# EAGLE board 13594-ESP8266-Thing-Dev-4H-panel.10 (EAGLE 7.5.0), part 1 of 7
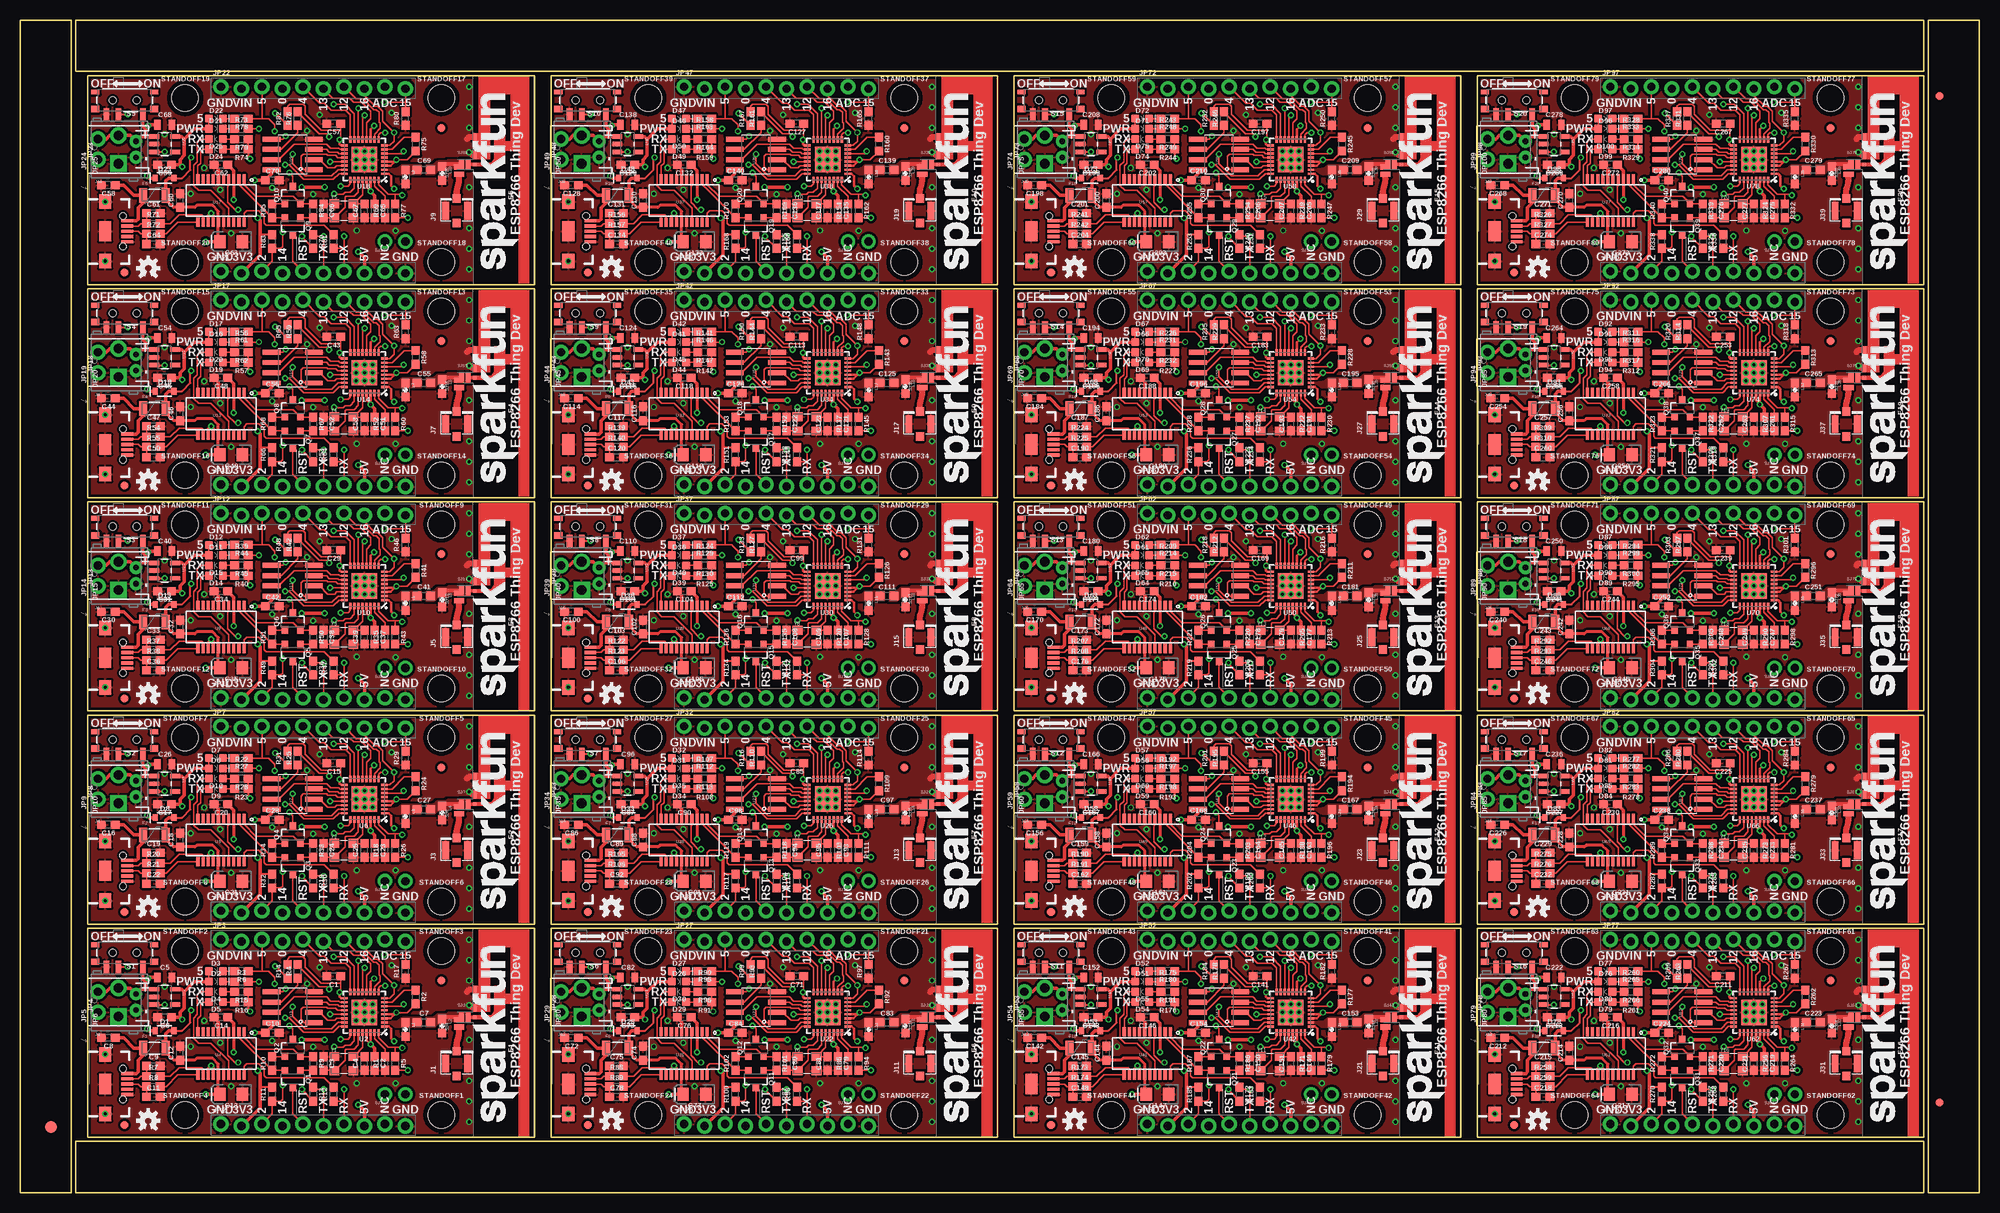
[diagram p0: board, top side]
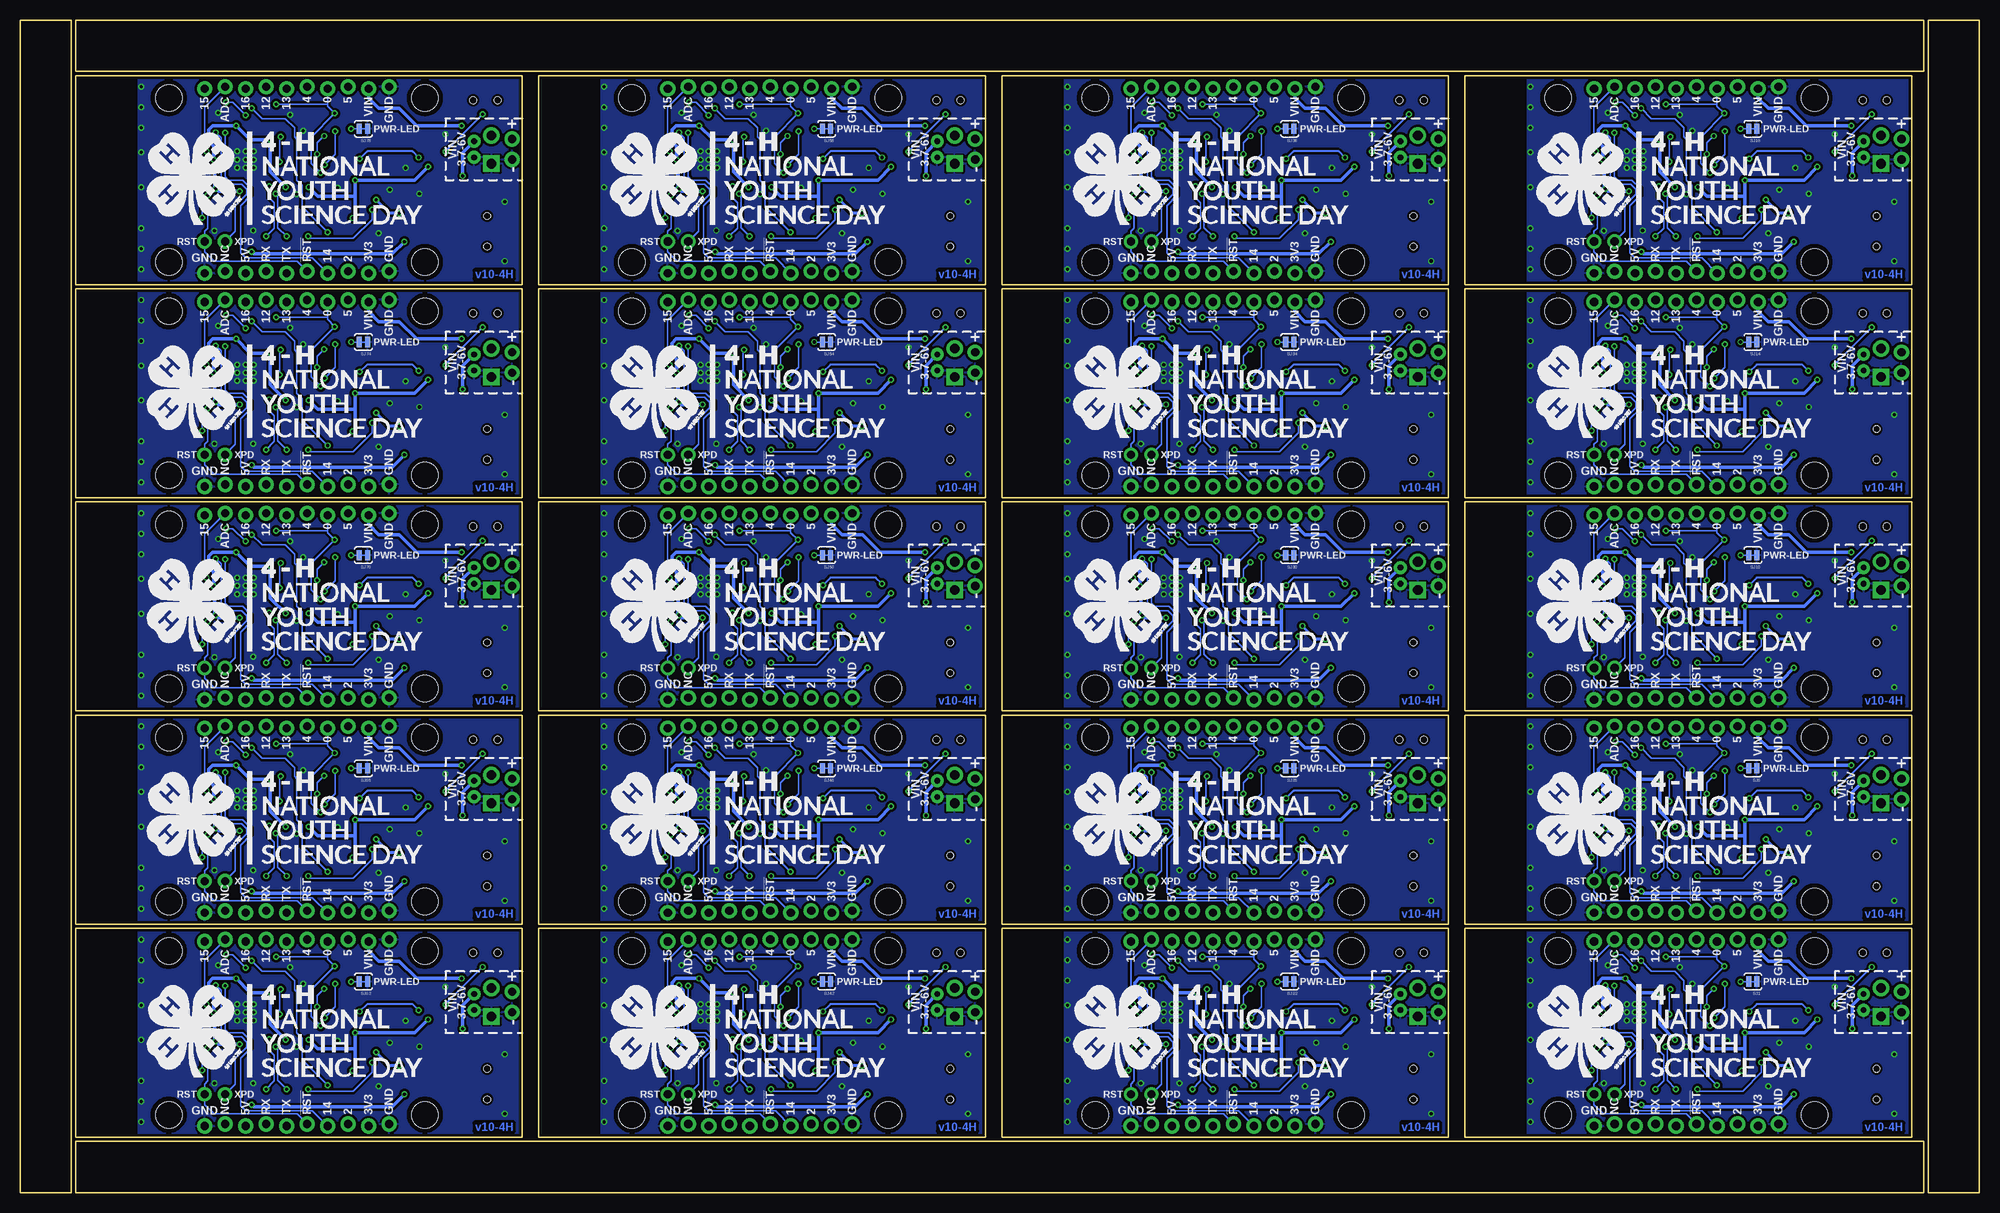
[diagram p1: board, bottom side, seen from below]

Size 242.82 x 145.29 mm. Coordinates in mm from the lower left corner, seen from the top.
Outline: 6.35,77.22 6.35,0 0,0 0,27.69
Outline: 0,25.15 0,145.29 6.35,145.29 6.35,74.68
Outline: 79.25,0 6.86,0 6.86,6.35 29.72,6.35
Outline: 27.18,6.35 235.97,6.35 235.97,0 76.71,0
Outline: 163.58,145.29 235.97,145.29 235.97,138.94 213.11,138.94
Outline: 215.65,138.94 6.86,138.94 6.86,145.29 166.12,145.29
Outline: 236.47,72.9 236.47,145.29 242.82,145.29 242.82,122.43
Outline: 242.82,124.97 242.82,0 236.47,0 236.47,75.44
Outline: 8.38,6.86 8.38,32.77 63.75,32.77 63.75,6.86 8.38,6.86
Outline: 8.38,33.27 8.38,59.18 63.75,59.18 63.75,33.27 8.38,33.27
Outline: 8.38,59.69 8.38,85.6 63.75,85.6 63.75,59.69 8.38,59.69
Outline: 8.38,86.11 8.38,112.01 63.75,112.01 63.75,86.11 8.38,86.11
Outline: 8.38,112.52 8.38,138.43 63.75,138.43 63.75,112.52 8.38,112.52
Outline: 65.79,6.86 65.79,32.77 121.16,32.77 121.16,6.86 65.79,6.86
Outline: 65.79,33.27 65.79,59.18 121.16,59.18 121.16,33.27 65.79,33.27
Outline: 65.79,59.69 65.79,85.6 121.16,85.6 121.16,59.69 65.79,59.69
Outline: 65.79,86.11 65.79,112.01 121.16,112.01 121.16,86.11 65.79,86.11
Outline: 65.79,112.52 65.79,138.43 121.16,138.43 121.16,112.52 65.79,112.52
Outline: 123.19,6.86 123.19,32.77 178.56,32.77 178.56,6.86 123.19,6.86
Outline: 123.19,33.27 123.19,59.18 178.56,59.18 178.56,33.27 123.19,33.27
Outline: 123.19,59.69 123.19,85.6 178.56,85.6 178.56,59.69 123.19,59.69
Outline: 123.19,86.11 123.19,112.01 178.56,112.01 178.56,86.11 123.19,86.11
Outline: 123.19,112.52 123.19,138.43 178.56,138.43 178.56,112.52 123.19,112.52
Outline: 180.59,6.86 180.59,32.77 235.97,32.77 235.97,6.86 180.59,6.86
Outline: 180.59,33.27 180.59,59.18 235.97,59.18 235.97,33.27 180.59,33.27
Outline: 180.59,59.69 180.59,85.6 235.97,85.6 235.97,59.69 180.59,59.69
Outline: 180.59,86.11 180.59,112.01 235.97,112.01 235.97,86.11 180.59,86.11
Outline: 180.59,112.52 180.59,138.43 235.97,138.43 235.97,112.52 180.59,112.52
Copper layers (1*16): Top 0.035mm / dielectric 1.5mm / Bottom 0.035mm
Design rules "SparkFun-2-layer-TIGHT": minimum track width 7mil, minimum drill 15mil, track to track 7mil, track to pad 7mil, pad to pad 7mil, via to via 7mil, smd to smd 7mil, copper to edge 7mil, drill to drill 7mil, minimum pad ring 7mil, minimum via ring 7mil, stop-mask expansion 4mil, vias tented up to drill 25mil, thermal gap 10mil

## Footprints (pad centres in the part's own frame; a part is rotated, then mirrored left to right if it is on the bottom)
0603 = smd 1.1 x 1: 1 -0.85,0; 2 0.85,0
0805 = smd 0.8 x 1.2: 1 -0.9,0; 2 0.9,0
EIA3216 = smd 1.4 x 1.6: + 1.4,0; - -1.4,0
SOD-323 = smd 0.63 x 0.83: A 1.15,0; C -1.15,0
LED-0603 = smd 1 x 1: A -0.877,0; C 0.877,0
TRACE_ANTENNA_2.4GHZ_25.7MM = smd 0.46 x 0.46: ANT 0,0.23 | smd 1 x 0.46: GND -1.18,0.23; GND2 -3.38,0.23
FIDUCIAL-1.5X3 = smd 1.5 x 1.5: 1 0,0
FIDUCIAL-1X2 = smd 1 x 1: 1 0,0
PTC-1206 = smd 1 x 1.8: 1 -1.4,0; 2 1.4,0
U.FL = smd 2.2 x 0.85: P$1 0,1.375; P$2 0,-1.375 | smd 1.05 x 1: P$3 1.525,0; P$4 -1.525,0
USB-B-MICRO-SMD_V03 = smd 1.45 x 0.4: D+ 2.725,0; D- 2.725,0.65; GND 2.725,-1.3; ID 2.725,-0.65; VBUS 2.725,1.3 | smd 1.5 x 1.8: SHIELD1 0,3.685; SHIELD2 0,-3.685 | smd 1.5 x 2.5: SHIELD3 0,0 | hole 0.85: 2.2,1.9; 2.2,-1.9
1X10_LOCK_NS = drill 1.016 pad 1.88: 1 0,0.127; 2 2.54,-0.127; 3 5.08,0.127; 4 7.62,-0.127; 5 10.16,0.127; 6 12.7,-0.127; 7 15.24,0.127; 8 17.78,-0.127; 9 20.32,0.127; 10 22.86,-0.127
JST-2-PTH = drill 0.7 pad 1.6: 1 -1,0; 2 1,0
1X02_NO_SILK = drill 1.016 pad 1.88: 1 0,0; 2 2.54,0
SCREWTERMINAL-3.5MM-2-NS = drill 1.2 pad 2.032 square: 1 0,0 | drill 1.2 pad 2.032: 2 3.5,0
SOT23-3 = smd 0.8 x 0.9: 1 -0.95,-1; 2 0.95,-1; 3 0,1.1
SWITCH_SPST_SMD_A = smd 0.7 x 1.5: 1 -2.25,-1.75; 2 -0.75,-1.75; 3 2.25,-1.75 | smd 1 x 0.6: GND1 -3.65,1; GND3 3.65,1 | smd 1 x 0.8: GND2 -3.65,-1.1; GND4 3.65,-1.1 | hole 0.9: -1.5,0; 1.5,0
PAD-JUMPER-2-NC_BY_TRACE_YES_SILK = smd 0.635 x 1.27: 1 -0.508,0; 2 0.508,0
PTH-JUMPER-2-NO_NO_SILK = drill 1.016 pad 1.778: 1 -1.27,0; 2 1.27,0
PAD-JUMPER-2-NC_BY_PASTE_NO_SILK = smd 0.635 x 1.27: 1 -0.401,0; 2 0.413,0
PAD-JUMPER-2-NO_NO_SILK = smd 0.635 x 1.27: 1 -0.45,0; 2 0.45,0
STAND-OFF = hole 3.302: 0,0
SOT23-5 = smd 0.55 x 1.2: 1 -0.95,-1.3; 2 0,-1.3; 3 0.95,-1.3; 4 0.95,1.3; 5 -0.95,1.3
QFN32-5X5MM = smd 0.8 x 0.285: 1 -2.5,1.75; 2 -2.5,1.25; 3 -2.5,0.75; 4 -2.5,0.25; 5 -2.5,-0.25; 6 -2.5,-0.75; 7 -2.5,-1.25; 8 -2.5,-1.75; 17 2.5,-1.75; 18 2.5,-1.25; 19 2.5,-0.75; 20 2.5,-0.25; 21 2.5,0.25; 22 2.5,0.75; 23 2.5,1.25; 24 2.5,1.75 | smd 0.285 x 0.8: 9 -1.75,-2.5; 10 -1.25,-2.5; 11 -0.75,-2.5; 12 -0.25,-2.5; 13 0.25,-2.5; 14 0.75,-2.5; 15 1.25,-2.5; 16 1.75,-2.5; 25 1.75,2.5; 26 1.25,2.5; 27 0.75,2.5; 28 0.25,2.5; 29 -0.25,2.5; 30 -0.75,2.5; 31 -1.25,2.5; 32 -1.75,2.5 | smd 3.15 x 3.15: EP 0,0
SO08 = smd 0.61 x 2.21: 1 -1.905,-2.616; 2 -0.635,-2.616; 3 0.635,-2.616; 4 1.905,-2.616; 5 1.905,2.616; 6 0.635,2.616; 7 -0.635,2.616; 8 -1.905,2.616
SSOP20_L = smd 0.381 x 1.143: 1 -2.857,-2.68; 2 -2.223,-2.68; 3 -1.587,-2.68; 4 -0.953,-2.68; 5 -0.318,-2.68; 6 0.318,-2.68; 7 0.953,-2.68; 8 1.587,-2.68; 9 2.223,-2.68; 10 2.857,-2.68; 11 2.857,2.68; 12 2.223,2.68; 13 1.587,2.68; 14 0.953,2.68; 15 0.318,2.68; 16 -0.318,2.68; 17 -0.953,2.68; 18 -1.587,2.68; 19 -2.223,2.68; 20 -2.857,2.68
CRYSTAL-SMD-3.2X2.5 = smd 1.2 x 1.1: 1 -1.175,-0.875; 2 1.175,-0.875; 3 1.175,0.875; 4 -1.175,0.875

## Placement (x,y rotation side)
C1  10uF  [0603]  38.86,26.8 180 top
C2  0.1uF  [0603]  43.94,16 270 top
C3  10pF  [0603]  37.59,16 270 top
C4  10pF  [0603]  42.67,16 90 top
C5  1.0uF  [0805]  17.91,26.67 0 top
C6  2.2uF  [0603]  17.91,21.72 180 top
C7  5.6PF  [0603]  50.04,21.11 0 top
C8  0.1uF  [0603]  10.92,19.18 180 top
C9  47pF  [0603]  16.51,15.7 0 top
C10  0.1uF  [0603]  31.24,19.81 0 top
C11  47pF  [0603]  16.51,11.89 0 top
C12  0.1uF  [0603]  19.81,17.27 90 top
C13  10uF  [EIA3216]  26.16,12.19 180 top
C14  0.1uF  [0603]  24.89,21.72 180 top
C15  10uF  [0603]  38.86,53.21 180 top
C16  0.1uF  [0603]  10.92,45.59 180 top
C17  2.2uF  [0603]  17.91,48.13 180 top
C18  0.1uF  [0603]  19.81,43.69 90 top
C19  47pF  [0603]  16.51,42.11 0 top
C20  0.1uF  [0603]  24.89,48.13 180 top
C21  10uF  [EIA3216]  26.16,38.61 180 top
C22  47pF  [0603]  16.51,38.3 0 top
C23  0.1uF  [0603]  43.94,42.42 270 top
C24  10pF  [0603]  37.59,42.42 270 top
C25  10pF  [0603]  42.67,42.42 90 top
C26  1.0uF  [0805]  17.91,53.09 0 top
C27  5.6PF  [0603]  50.04,47.52 0 top
C28  0.1uF  [0603]  31.24,46.23 0 top
C29  10uF  [0603]  38.86,79.63 180 top
C30  0.1uF  [0603]  10.92,72.01 180 top
C31  2.2uF  [0603]  17.91,74.55 180 top
C32  0.1uF  [0603]  19.81,70.1 90 top
C33  47pF  [0603]  16.51,68.53 0 top
C34  0.1uF  [0603]  24.89,74.55 180 top
C35  10uF  [EIA3216]  26.16,65.02 180 top
C36  47pF  [0603]  16.51,64.72 0 top
C37  0.1uF  [0603]  43.94,68.83 270 top
C38  10pF  [0603]  37.59,68.83 270 top
C39  10pF  [0603]  42.67,68.83 90 top
C40  1.0uF  [0805]  17.91,79.5 0 top
C41  5.6PF  [0603]  50.04,73.94 0 top
C42  0.1uF  [0603]  31.24,72.64 0 top
C43  10uF  [0603]  38.86,106.05 180 top
C44  0.1uF  [0603]  10.92,98.42 180 top
C45  2.2uF  [0603]  17.91,100.97 180 top
C46  0.1uF  [0603]  19.81,96.52 90 top
C47  47pF  [0603]  16.51,94.95 0 top
C48  0.1uF  [0603]  24.89,100.97 180 top
C49  10uF  [EIA3216]  26.16,91.44 180 top
C50  47pF  [0603]  16.51,91.14 0 top
C51  0.1uF  [0603]  43.94,95.25 270 top
C52  10pF  [0603]  37.59,95.25 270 top
C53  10pF  [0603]  42.67,95.25 90 top
C54  1.0uF  [0805]  17.91,105.92 0 top
C55  5.6PF  [0603]  50.04,100.35 0 top
C56  0.1uF  [0603]  31.24,99.06 0 top
C57  10uF  [0603]  38.86,132.46 180 top
C58  0.1uF  [0603]  10.92,124.84 180 top
C59  2.2uF  [0603]  17.91,127.38 180 top
C60  0.1uF  [0603]  19.81,122.94 90 top
C61  47pF  [0603]  16.51,121.36 0 top
C62  0.1uF  [0603]  24.89,127.38 180 top
C63  10uF  [EIA3216]  26.16,117.86 180 top
C64  47pF  [0603]  16.51,117.55 0 top
C65  0.1uF  [0603]  43.94,121.67 270 top
C66  10pF  [0603]  37.59,121.67 270 top
C67  10pF  [0603]  42.67,121.67 90 top
C68  1.0uF  [0805]  17.91,132.33 0 top
C69  5.6PF  [0603]  50.04,126.77 0 top
C70  0.1uF  [0603]  31.24,125.48 0 top
C71  10uF  [0603]  96.27,26.8 180 top
C72  0.1uF  [0603]  68.33,19.18 180 top
C73  2.2uF  [0603]  75.31,21.72 180 top
C74  0.1uF  [0603]  77.22,17.27 90 top
C75  47pF  [0603]  73.91,15.7 0 top
C76  0.1uF  [0603]  82.3,21.72 180 top
C77  10uF  [EIA3216]  83.57,12.19 180 top
C78  47pF  [0603]  73.91,11.89 0 top
C79  0.1uF  [0603]  101.35,16 270 top
C80  10pF  [0603]  95,16 270 top
C81  10pF  [0603]  100.08,16 90 top
C82  1.0uF  [0805]  75.31,26.67 0 top
C83  5.6PF  [0603]  107.44,21.11 0 top
C84  0.1uF  [0603]  88.65,19.81 0 top
C85  10uF  [0603]  96.27,53.21 180 top
C86  0.1uF  [0603]  68.33,45.59 180 top
C87  2.2uF  [0603]  75.31,48.13 180 top
C88  0.1uF  [0603]  77.22,43.69 90 top
C89  47pF  [0603]  73.91,42.11 0 top
C90  0.1uF  [0603]  82.3,48.13 180 top
C91  10uF  [EIA3216]  83.57,38.61 180 top
C92  47pF  [0603]  73.91,38.3 0 top
C93  0.1uF  [0603]  101.35,42.42 270 top
C94  10pF  [0603]  95,42.42 270 top
C95  10pF  [0603]  100.08,42.42 90 top
C96  1.0uF  [0805]  75.31,53.09 0 top
C97  5.6PF  [0603]  107.44,47.52 0 top
C98  0.1uF  [0603]  88.65,46.23 0 top
C99  10uF  [0603]  96.27,79.63 180 top
C100  0.1uF  [0603]  68.33,72.01 180 top
C101  2.2uF  [0603]  75.31,74.55 180 top
C102  0.1uF  [0603]  77.22,70.1 90 top
C103  47pF  [0603]  73.91,68.53 0 top
C104  0.1uF  [0603]  82.3,74.55 180 top
C105  10uF  [EIA3216]  83.57,65.02 180 top
C106  47pF  [0603]  73.91,64.72 0 top
C107  0.1uF  [0603]  101.35,68.83 270 top
C108  10pF  [0603]  95,68.83 270 top
C109  10pF  [0603]  100.08,68.83 90 top
C110  1.0uF  [0805]  75.31,79.5 0 top
C111  5.6PF  [0603]  107.44,73.94 0 top
C112  0.1uF  [0603]  88.65,72.64 0 top
C113  10uF  [0603]  96.27,106.05 180 top
C114  0.1uF  [0603]  68.33,98.42 180 top
C115  2.2uF  [0603]  75.31,100.97 180 top
C116  0.1uF  [0603]  77.22,96.52 90 top
C117  47pF  [0603]  73.91,94.95 0 top
C118  0.1uF  [0603]  82.3,100.97 180 top
C119  10uF  [EIA3216]  83.57,91.44 180 top
C120  47pF  [0603]  73.91,91.14 0 top
C121  0.1uF  [0603]  101.35,95.25 270 top
C122  10pF  [0603]  95,95.25 270 top
C123  10pF  [0603]  100.08,95.25 90 top
C124  1.0uF  [0805]  75.31,105.92 0 top
C125  5.6PF  [0603]  107.44,100.35 0 top
C126  0.1uF  [0603]  88.65,99.06 0 top
C127  10uF  [0603]  96.27,132.46 180 top
C128  0.1uF  [0603]  68.33,124.84 180 top
C129  2.2uF  [0603]  75.31,127.38 180 top
C130  0.1uF  [0603]  77.22,122.94 90 top
C131  47pF  [0603]  73.91,121.36 0 top
C132  0.1uF  [0603]  82.3,127.38 180 top
C133  10uF  [EIA3216]  83.57,117.86 180 top
C134  47pF  [0603]  73.91,117.55 0 top
C135  0.1uF  [0603]  101.35,121.67 270 top
C136  10pF  [0603]  95,121.67 270 top
C137  10pF  [0603]  100.08,121.67 90 top
C138  1.0uF  [0805]  75.31,132.33 0 top
C139  5.6PF  [0603]  107.44,126.77 0 top
C140  0.1uF  [0603]  88.65,125.48 0 top
C141  10uF  [0603]  153.67,26.8 180 top
C142  0.1uF  [0603]  125.73,19.18 180 top
C143  2.2uF  [0603]  132.72,21.72 180 top
C144  0.1uF  [0603]  134.62,17.27 90 top
C145  47pF  [0603]  131.32,15.7 0 top
C146  0.1uF  [0603]  139.7,21.72 180 top
C147  10uF  [EIA3216]  140.97,12.19 180 top
C148  47pF  [0603]  131.32,11.89 0 top
C149  0.1uF  [0603]  158.75,16 270 top
C150  10pF  [0603]  152.4,16 270 top
C151  10pF  [0603]  157.48,16 90 top
C152  1.0uF  [0805]  132.72,26.67 0 top
C153  5.6PF  [0603]  164.85,21.11 0 top
C154  0.1uF  [0603]  146.05,19.81 0 top
C155  10uF  [0603]  153.67,53.21 180 top
C156  0.1uF  [0603]  125.73,45.59 180 top
C157  2.2uF  [0603]  132.72,48.13 180 top
C158  0.1uF  [0603]  134.62,43.69 90 top
C159  47pF  [0603]  131.32,42.11 0 top
C160  0.1uF  [0603]  139.7,48.13 180 top
C161  10uF  [EIA3216]  140.97,38.61 180 top
C162  47pF  [0603]  131.32,38.3 0 top
C163  0.1uF  [0603]  158.75,42.42 270 top
C164  10pF  [0603]  152.4,42.42 270 top
C165  10pF  [0603]  157.48,42.42 90 top
C166  1.0uF  [0805]  132.72,53.09 0 top
C167  5.6PF  [0603]  164.85,47.52 0 top
C168  0.1uF  [0603]  146.05,46.23 0 top
C169  10uF  [0603]  153.67,79.63 180 top
C170  0.1uF  [0603]  125.73,72.01 180 top
C171  2.2uF  [0603]  132.72,74.55 180 top
C172  0.1uF  [0603]  134.62,70.1 90 top
C173  47pF  [0603]  131.32,68.53 0 top
C174  0.1uF  [0603]  139.7,74.55 180 top
C175  10uF  [EIA3216]  140.97,65.02 180 top
C176  47pF  [0603]  131.32,64.72 0 top
C177  0.1uF  [0603]  158.75,68.83 270 top
C178  10pF  [0603]  152.4,68.83 270 top
C179  10pF  [0603]  157.48,68.83 90 top
C180  1.0uF  [0805]  132.72,79.5 0 top
C181  5.6PF  [0603]  164.85,73.94 0 top
C182  0.1uF  [0603]  146.05,72.64 0 top
C183  10uF  [0603]  153.67,106.05 180 top
C184  0.1uF  [0603]  125.73,98.42 180 top
C185  2.2uF  [0603]  132.72,100.97 180 top
C186  0.1uF  [0603]  134.62,96.52 90 top
C187  47pF  [0603]  131.32,94.95 0 top
C188  0.1uF  [0603]  139.7,100.97 180 top
C189  10uF  [EIA3216]  140.97,91.44 180 top
C190  47pF  [0603]  131.32,91.14 0 top
C191  0.1uF  [0603]  158.75,95.25 270 top
C192  10pF  [0603]  152.4,95.25 270 top
C193  10pF  [0603]  157.48,95.25 90 top
C194  1.0uF  [0805]  132.72,105.92 0 top
C195  5.6PF  [0603]  164.85,100.35 0 top
C196  0.1uF  [0603]  146.05,99.06 0 top
C197  10uF  [0603]  153.67,132.46 180 top
C198  0.1uF  [0603]  125.73,124.84 180 top
C199  2.2uF  [0603]  132.72,127.38 180 top
C200  0.1uF  [0603]  134.62,122.94 90 top
C201  47pF  [0603]  131.32,121.36 0 top
C202  0.1uF  [0603]  139.7,127.38 180 top
C203  10uF  [EIA3216]  140.97,117.86 180 top
C204  47pF  [0603]  131.32,117.55 0 top
C205  0.1uF  [0603]  158.75,121.67 270 top
C206  10pF  [0603]  152.4,121.67 270 top
C207  10pF  [0603]  157.48,121.67 90 top
C208  1.0uF  [0805]  132.72,132.33 0 top
C209  5.6PF  [0603]  164.85,126.77 0 top
C210  0.1uF  [0603]  146.05,125.48 0 top
C211  10uF  [0603]  211.07,26.8 180 top
C212  0.1uF  [0603]  183.13,19.18 180 top
C213  2.2uF  [0603]  190.12,21.72 180 top
C214  0.1uF  [0603]  192.02,17.27 90 top
C215  47pF  [0603]  188.72,15.7 0 top
C216  0.1uF  [0603]  197.1,21.72 180 top
C217  10uF  [EIA3216]  198.37,12.19 180 top
C218  47pF  [0603]  188.72,11.89 0 top
C219  0.1uF  [0603]  216.15,16 270 top
C220  10pF  [0603]  209.8,16 270 top
C221  10pF  [0603]  214.88,16 90 top
C222  1.0uF  [0805]  190.12,26.67 0 top
C223  5.6PF  [0603]  222.25,21.11 0 top
C224  0.1uF  [0603]  203.45,19.81 0 top
C225  10uF  [0603]  211.07,53.21 180 top
C226  0.1uF  [0603]  183.13,45.59 180 top
C227  2.2uF  [0603]  190.12,48.13 180 top
C228  0.1uF  [0603]  192.02,43.69 90 top
C229  47pF  [0603]  188.72,42.11 0 top
C230  0.1uF  [0603]  197.1,48.13 180 top
C231  10uF  [EIA3216]  198.37,38.61 180 top
C232  47pF  [0603]  188.72,38.3 0 top
C233  0.1uF  [0603]  216.15,42.42 270 top
C234  10pF  [0603]  209.8,42.42 270 top
C235  10pF  [0603]  214.88,42.42 90 top
C236  1.0uF  [0805]  190.12,53.09 0 top
C237  5.6PF  [0603]  222.25,47.52 0 top
C238  0.1uF  [0603]  203.45,46.23 0 top
C239  10uF  [0603]  211.07,79.63 180 top
C240  0.1uF  [0603]  183.13,72.01 180 top
C241  2.2uF  [0603]  190.12,74.55 180 top
C242  0.1uF  [0603]  192.02,70.1 90 top
C243  47pF  [0603]  188.72,68.53 0 top
C244  0.1uF  [0603]  197.1,74.55 180 top
C245  10uF  [EIA3216]  198.37,65.02 180 top
C246  47pF  [0603]  188.72,64.72 0 top
C247  0.1uF  [0603]  216.15,68.83 270 top
C248  10pF  [0603]  209.8,68.83 270 top
C249  10pF  [0603]  214.88,68.83 90 top
C250  1.0uF  [0805]  190.12,79.5 0 top
C251  5.6PF  [0603]  222.25,73.94 0 top
C252  0.1uF  [0603]  203.45,72.64 0 top
C253  10uF  [0603]  211.07,106.05 180 top
C254  0.1uF  [0603]  183.13,98.42 180 top
C255  2.2uF  [0603]  190.12,100.97 180 top
C256  0.1uF  [0603]  192.02,96.52 90 top
C257  47pF  [0603]  188.72,94.95 0 top
C258  0.1uF  [0603]  197.1,100.97 180 top
C259  10uF  [EIA3216]  198.37,91.44 180 top
C260  47pF  [0603]  188.72,91.14 0 top
C261  0.1uF  [0603]  216.15,95.25 270 top
C262  10pF  [0603]  209.8,95.25 270 top
C263  10pF  [0603]  214.88,95.25 90 top
C264  1.0uF  [0805]  190.12,105.92 0 top
C265  5.6PF  [0603]  222.25,100.35 0 top
C266  0.1uF  [0603]  203.45,99.06 0 top
C267  10uF  [0603]  211.07,132.46 180 top
C268  0.1uF  [0603]  183.13,124.84 180 top
C269  2.2uF  [0603]  190.12,127.38 180 top
C270  0.1uF  [0603]  192.02,122.94 90 top
C271  47pF  [0603]  188.72,121.36 0 top
C272  0.1uF  [0603]  197.1,127.38 180 top
C273  10uF  [EIA3216]  198.37,117.86 180 top
C274  47pF  [0603]  188.72,117.55 0 top
C275  0.1uF  [0603]  216.15,121.67 270 top
C276  10pF  [0603]  209.8,121.67 270 top
C277  10pF  [0603]  214.88,121.67 90 top
C278  1.0uF  [0805]  190.12,132.33 0 top
C279  5.6PF  [0603]  222.25,126.77 0 top
C280  0.1uF  [0603]  203.45,125.48 0 top
D1  1A/23V/620mV  [SOD-323]  17.91,20.07 0 top
D2  RED  [LED-0603]  24.26,26.16 0 top
D3  BLUE  [LED-0603]  24.26,27.43 0 top
D4  Yellow  [LED-0603]  24.26,24.89 180 top
D5  GREEN  [LED-0603]  24.26,23.62 180 top
D6  RED  [LED-0603]  24.26,52.58 0 top
D7  BLUE  [LED-0603]  24.26,53.85 0 top
D8  1A/23V/620mV  [SOD-323]  17.91,46.48 0 top
D9  GREEN  [LED-0603]  24.26,50.04 180 top
D10  Yellow  [LED-0603]  24.26,51.31 180 top
D11  RED  [LED-0603]  24.26,78.99 0 top
D12  BLUE  [LED-0603]  24.26,80.26 0 top
D13  1A/23V/620mV  [SOD-323]  17.91,72.9 0 top
D14  GREEN  [LED-0603]  24.26,76.45 180 top
D15  Yellow  [LED-0603]  24.26,77.72 180 top
D16  RED  [LED-0603]  24.26,105.41 0 top
D17  BLUE  [LED-0603]  24.26,106.68 0 top
D18  1A/23V/620mV  [SOD-323]  17.91,99.31 0 top
D19  GREEN  [LED-0603]  24.26,102.87 180 top
D20  Yellow  [LED-0603]  24.26,104.14 180 top
D21  RED  [LED-0603]  24.26,131.83 0 top
D22  BLUE  [LED-0603]  24.26,133.1 0 top
D23  1A/23V/620mV  [SOD-323]  17.91,125.73 0 top
D24  GREEN  [LED-0603]  24.26,129.29 180 top
D25  Yellow  [LED-0603]  24.26,130.56 180 top
D26  RED  [LED-0603]  81.66,26.16 0 top
D27  BLUE  [LED-0603]  81.66,27.43 0 top
D28  1A/23V/620mV  [SOD-323]  75.31,20.07 0 top
D29  GREEN  [LED-0603]  81.66,23.62 180 top
D30  Yellow  [LED-0603]  81.66,24.89 180 top
D31  RED  [LED-0603]  81.66,52.58 0 top
D32  BLUE  [LED-0603]  81.66,53.85 0 top
D33  1A/23V/620mV  [SOD-323]  75.31,46.48 0 top
D34  GREEN  [LED-0603]  81.66,50.04 180 top
D35  Yellow  [LED-0603]  81.66,51.31 180 top
D36  RED  [LED-0603]  81.66,78.99 0 top
D37  BLUE  [LED-0603]  81.66,80.26 0 top
D38  1A/23V/620mV  [SOD-323]  75.31,72.9 0 top
D39  GREEN  [LED-0603]  81.66,76.45 180 top
D40  Yellow  [LED-0603]  81.66,77.72 180 top
D41  RED  [LED-0603]  81.66,105.41 0 top
D42  BLUE  [LED-0603]  81.66,106.68 0 top
D43  1A/23V/620mV  [SOD-323]  75.31,99.31 0 top
D44  GREEN  [LED-0603]  81.66,102.87 180 top
D45  Yellow  [LED-0603]  81.66,104.14 180 top
D46  RED  [LED-0603]  81.66,131.83 0 top
D47  BLUE  [LED-0603]  81.66,133.1 0 top
D48  1A/23V/620mV  [SOD-323]  75.31,125.73 0 top
D49  GREEN  [LED-0603]  81.66,129.29 180 top
D50  Yellow  [LED-0603]  81.66,130.56 180 top
D51  RED  [LED-0603]  139.06,26.16 0 top
D52  BLUE  [LED-0603]  139.06,27.43 0 top
D53  1A/23V/620mV  [SOD-323]  132.72,20.07 0 top
D54  GREEN  [LED-0603]  139.06,23.62 180 top
D55  Yellow  [LED-0603]  139.06,24.89 180 top
D56  RED  [LED-0603]  139.06,52.58 0 top
D57  BLUE  [LED-0603]  139.06,53.85 0 top
D58  1A/23V/620mV  [SOD-323]  132.72,46.48 0 top
D59  GREEN  [LED-0603]  139.06,50.04 180 top
D60  Yellow  [LED-0603]  139.06,51.31 180 top
D61  RED  [LED-0603]  139.06,78.99 0 top
D62  BLUE  [LED-0603]  139.06,80.26 0 top
D63  1A/23V/620mV  [SOD-323]  132.72,72.9 0 top
D64  GREEN  [LED-0603]  139.06,76.45 180 top
D65  Yellow  [LED-0603]  139.06,77.72 180 top
D66  RED  [LED-0603]  139.06,105.41 0 top
D67  BLUE  [LED-0603]  139.06,106.68 0 top
D68  1A/23V/620mV  [SOD-323]  132.72,99.31 0 top
D69  GREEN  [LED-0603]  139.06,102.87 180 top
D70  Yellow  [LED-0603]  139.06,104.14 180 top
D71  RED  [LED-0603]  139.06,131.83 0 top
D72  BLUE  [LED-0603]  139.06,133.1 0 top
D73  1A/23V/620mV  [SOD-323]  132.72,125.73 0 top
D74  GREEN  [LED-0603]  139.06,129.29 180 top
D75  Yellow  [LED-0603]  139.06,130.56 180 top
D76  RED  [LED-0603]  196.47,26.16 0 top
D77  BLUE  [LED-0603]  196.47,27.43 0 top
D78  1A/23V/620mV  [SOD-323]  190.12,20.07 0 top
D79  GREEN  [LED-0603]  196.47,23.62 180 top
D80  Yellow  [LED-0603]  196.47,24.89 180 top
D81  RED  [LED-0603]  196.47,52.58 0 top
D82  BLUE  [LED-0603]  196.47,53.85 0 top
D83  1A/23V/620mV  [SOD-323]  190.12,46.48 0 top
D84  GREEN  [LED-0603]  196.47,50.04 180 top
D85  Yellow  [LED-0603]  196.47,51.31 180 top
D86  RED  [LED-0603]  196.47,78.99 0 top
D87  BLUE  [LED-0603]  196.47,80.26 0 top
D88  1A/23V/620mV  [SOD-323]  190.12,72.9 0 top
D89  GREEN  [LED-0603]  196.47,76.45 180 top
D90  Yellow  [LED-0603]  196.47,77.72 180 top
D91  RED  [LED-0603]  196.47,105.41 0 top
D92  BLUE  [LED-0603]  196.47,106.68 0 top
D93  1A/23V/620mV  [SOD-323]  190.12,99.31 0 top
D94  GREEN  [LED-0603]  196.47,102.87 180 top
D95  Yellow  [LED-0603]  196.47,104.14 180 top
D96  RED  [LED-0603]  196.47,131.83 0 top
D97  BLUE  [LED-0603]  196.47,133.1 0 top
D98  1A/23V/620mV  [SOD-323]  190.12,125.73 0 top
D99  GREEN  [LED-0603]  196.47,129.29 180 top
D100  Yellow  [LED-0603]  196.47,130.56 180 top
E1  [TRACE_ANTENNA_2.4GHZ_25.7MM]  56.13,21.74 270 top
E2  [TRACE_ANTENNA_2.4GHZ_25.7MM]  56.13,48.16 270 top
E3  [TRACE_ANTENNA_2.4GHZ_25.7MM]  56.13,74.57 270 top
E4  [TRACE_ANTENNA_2.4GHZ_25.7MM]  56.13,100.99 270 top
E5  [TRACE_ANTENNA_2.4GHZ_25.7MM]  56.13,127.41 270 top
E6  [TRACE_ANTENNA_2.4GHZ_25.7MM]  113.54,21.74 270 top
E7  [TRACE_ANTENNA_2.4GHZ_25.7MM]  113.54,48.16 270 top
E8  [TRACE_ANTENNA_2.4GHZ_25.7MM]  113.54,74.57 270 top
E9  [TRACE_ANTENNA_2.4GHZ_25.7MM]  113.54,100.99 270 top
E10  [TRACE_ANTENNA_2.4GHZ_25.7MM]  113.54,127.41 270 top
E11  [TRACE_ANTENNA_2.4GHZ_25.7MM]  170.94,21.74 270 top
E12  [TRACE_ANTENNA_2.4GHZ_25.7MM]  170.94,48.16 270 top
E13  [TRACE_ANTENNA_2.4GHZ_25.7MM]  170.94,74.57 270 top
E14  [TRACE_ANTENNA_2.4GHZ_25.7MM]  170.94,100.99 270 top
E15  [TRACE_ANTENNA_2.4GHZ_25.7MM]  170.94,127.41 270 top
E16  [TRACE_ANTENNA_2.4GHZ_25.7MM]  228.35,21.74 270 top
E17  [TRACE_ANTENNA_2.4GHZ_25.7MM]  228.35,48.16 270 top
E18  [TRACE_ANTENNA_2.4GHZ_25.7MM]  228.35,74.57 270 top
E19  [TRACE_ANTENNA_2.4GHZ_25.7MM]  228.35,100.99 270 top
E20  [TRACE_ANTENNA_2.4GHZ_25.7MM]  228.35,127.41 270 top
E$1  [FIDUCIAL-1.5X3]  3.81,8.13 0 top
E$7  [FIDUCIAL-1X2]  237.87,135.89 180 top
E$8  [FIDUCIAL-1X2]  237.87,11.18 0 top
F1  500mA  [PTC-1206]  16.64,17.91 0 top
F2  500mA  [PTC-1206]  16.64,44.32 0 top
F3  500mA  [PTC-1206]  16.64,70.74 0 top
F4  500mA  [PTC-1206]  16.64,97.16 0 top
F5  500mA  [PTC-1206]  16.64,123.57 0 top
F6  500mA  [PTC-1206]  74.04,17.91 0 top
F7  500mA  [PTC-1206]  74.04,44.32 0 top
F8  500mA  [PTC-1206]  74.04,70.74 0 top
F9  500mA  [PTC-1206]  74.04,97.16 0 top
F10  500mA  [PTC-1206]  74.04,123.57 0 top
F11  500mA  [PTC-1206]  131.44,17.91 0 top
F12  500mA  [PTC-1206]  131.44,44.32 0 top
F13  500mA  [PTC-1206]  131.44,70.74 0 top
F14  500mA  [PTC-1206]  131.44,97.16 0 top
F15  500mA  [PTC-1206]  131.44,123.57 0 top
F16  500mA  [PTC-1206]  188.85,17.91 0 top
F17  500mA  [PTC-1206]  188.85,44.32 0 top
F18  500mA  [PTC-1206]  188.85,70.74 0 top
F19  500mA  [PTC-1206]  188.85,97.16 0 top
F20  500mA  [PTC-1206]  188.85,123.57 0 top
FID1  FIDUCIAL1X2  [FIDUCIAL-1X2]  52.2,26.29 0 top
FID2  FIDUCIAL1X2  [FIDUCIAL-1X2]  12.95,8.38 0 top
FID3  FIDUCIAL1X2  [FIDUCIAL-1X2]  12.95,34.8 0 top
FID4  FIDUCIAL1X2  [FIDUCIAL-1X2]  52.2,52.7 0 top
FID5  FIDUCIAL1X2  [FIDUCIAL-1X2]  12.95,61.21 0 top
FID6  FIDUCIAL1X2  [FIDUCIAL-1X2]  52.2,79.12 0 top
FID7  FIDUCIAL1X2  [FIDUCIAL-1X2]  12.95,87.63 0 top
FID8  FIDUCIAL1X2  [FIDUCIAL-1X2]  52.2,105.54 0 top
FID9  FIDUCIAL1X2  [FIDUCIAL-1X2]  12.95,114.05 0 top
FID10  FIDUCIAL1X2  [FIDUCIAL-1X2]  52.2,131.95 0 top
FID11  FIDUCIAL1X2  [FIDUCIAL-1X2]  70.36,8.38 0 top
FID12  FIDUCIAL1X2  [FIDUCIAL-1X2]  109.6,26.29 0 top
FID13  FIDUCIAL1X2  [FIDUCIAL-1X2]  70.36,34.8 0 top
FID14  FIDUCIAL1X2  [FIDUCIAL-1X2]  109.6,52.7 0 top
FID15  FIDUCIAL1X2  [FIDUCIAL-1X2]  70.36,61.21 0 top
FID16  FIDUCIAL1X2  [FIDUCIAL-1X2]  109.6,79.12 0 top
FID17  FIDUCIAL1X2  [FIDUCIAL-1X2]  70.36,87.63 0 top
FID18  FIDUCIAL1X2  [FIDUCIAL-1X2]  109.6,105.54 0 top
FID19  FIDUCIAL1X2  [FIDUCIAL-1X2]  70.36,114.05 0 top
FID20  FIDUCIAL1X2  [FIDUCIAL-1X2]  109.6,131.95 0 top
FID21  FIDUCIAL1X2  [FIDUCIAL-1X2]  127.76,8.38 0 top
FID22  FIDUCIAL1X2  [FIDUCIAL-1X2]  167,26.29 0 top
FID23  FIDUCIAL1X2  [FIDUCIAL-1X2]  127.76,34.8 0 top
FID24  FIDUCIAL1X2  [FIDUCIAL-1X2]  167,52.7 0 top
FID25  FIDUCIAL1X2  [FIDUCIAL-1X2]  127.76,61.21 0 top
FID26  FIDUCIAL1X2  [FIDUCIAL-1X2]  167,79.12 0 top
FID27  FIDUCIAL1X2  [FIDUCIAL-1X2]  127.76,87.63 0 top
FID28  FIDUCIAL1X2  [FIDUCIAL-1X2]  167,105.54 0 top
FID29  FIDUCIAL1X2  [FIDUCIAL-1X2]  127.76,114.05 0 top
FID30  FIDUCIAL1X2  [FIDUCIAL-1X2]  167,131.95 0 top
FID31  FIDUCIAL1X2  [FIDUCIAL-1X2]  185.17,8.38 0 top
FID32  FIDUCIAL1X2  [FIDUCIAL-1X2]  224.41,26.29 0 top
FID33  FIDUCIAL1X2  [FIDUCIAL-1X2]  185.17,34.8 0 top
FID34  FIDUCIAL1X2  [FIDUCIAL-1X2]  224.41,52.7 0 top
FID35  FIDUCIAL1X2  [FIDUCIAL-1X2]  185.17,61.21 0 top
FID36  FIDUCIAL1X2  [FIDUCIAL-1X2]  224.41,79.12 0 top
FID37  FIDUCIAL1X2  [FIDUCIAL-1X2]  185.17,87.63 0 top
FID38  FIDUCIAL1X2  [FIDUCIAL-1X2]  224.41,105.54 0 top
FID39  FIDUCIAL1X2  [FIDUCIAL-1X2]  185.17,114.05 0 top
FID40  FIDUCIAL1X2  [FIDUCIAL-1X2]  224.41,131.95 0 top
J1  U.FL  [U.FL]  54.1,16 90 top
J2  [USB-B-MICRO-SMD_V03]  10.54,13.46 0 top
J3  U.FL  [U.FL]  54.1,42.42 90 top
J4  [USB-B-MICRO-SMD_V03]  10.54,39.88 0 top
J5  U.FL  [U.FL]  54.1,68.83 90 top
J6  [USB-B-MICRO-SMD_V03]  10.54,66.29 0 top
J7  U.FL  [U.FL]  54.1,95.25 90 top
J8  [USB-B-MICRO-SMD_V03]  10.54,92.71 0 top
J9  U.FL  [U.FL]  54.1,121.67 90 top
J10  [USB-B-MICRO-SMD_V03]  10.54,119.13 0 top
J11  U.FL  [U.FL]  111.51,16 90 top
J12  [USB-B-MICRO-SMD_V03]  67.94,13.46 0 top
J13  U.FL  [U.FL]  111.51,42.42 90 top
J14  [USB-B-MICRO-SMD_V03]  67.94,39.88 0 top
J15  U.FL  [U.FL]  111.51,68.83 90 top
J16  [USB-B-MICRO-SMD_V03]  67.94,66.29 0 top
J17  U.FL  [U.FL]  111.51,95.25 90 top
J18  [USB-B-MICRO-SMD_V03]  67.94,92.71 0 top
J19  U.FL  [U.FL]  111.51,121.67 90 top
J20  [USB-B-MICRO-SMD_V03]  67.94,119.13 0 top
J21  U.FL  [U.FL]  168.91,16 90 top
J22  [USB-B-MICRO-SMD_V03]  125.35,13.46 0 top
J23  U.FL  [U.FL]  168.91,42.42 90 top
J24  [USB-B-MICRO-SMD_V03]  125.35,39.88 0 top
J25  U.FL  [U.FL]  168.91,68.83 90 top
J26  [USB-B-MICRO-SMD_V03]  125.35,66.29 0 top
J27  U.FL  [U.FL]  168.91,95.25 90 top
J28  [USB-B-MICRO-SMD_V03]  125.35,92.71 0 top
J29  U.FL  [U.FL]  168.91,121.67 90 top
J30  [USB-B-MICRO-SMD_V03]  125.35,119.13 0 top
J31  U.FL  [U.FL]  226.31,16 90 top
J32  [USB-B-MICRO-SMD_V03]  182.75,13.46 0 top
J33  U.FL  [U.FL]  226.31,42.42 90 top
J34  [USB-B-MICRO-SMD_V03]  182.75,39.88 0 top
J35  U.FL  [U.FL]  226.31,68.83 90 top
J36  [USB-B-MICRO-SMD_V03]  182.75,66.29 0 top
J37  U.FL  [U.FL]  226.31,95.25 90 top
J38  [USB-B-MICRO-SMD_V03]  182.75,92.71 0 top
J39  U.FL  [U.FL]  226.31,121.67 90 top
J40  [USB-B-MICRO-SMD_V03]  182.75,119.13 0 top
JP1  [1X10_LOCK_NS]  24.89,34.8 0 top
JP2  [1X10_LOCK_NS]  24.89,8.38 0 top
JP3  [1X10_LOCK_NS]  24.89,31.24 0 top
JP4  [JST-2-PTH]  14.35,23.62 90 top
JP5  [1X02_NO_SILK]  9.65,22.35 90 top
JP6  [SCREWTERMINAL-3.5MM-2-NS]  12.19,21.84 90 top
JP7  [1X10_LOCK_NS]  24.89,57.66 0 top
JP8  [JST-2-PTH]  14.35,50.04 90 top
JP9  [1X02_NO_SILK]  9.65,48.77 90 top
JP10  [SCREWTERMINAL-3.5MM-2-NS]  12.19,48.26 90 top
JP11  [1X10_LOCK_NS]  24.89,61.21 0 top
JP12  [1X10_LOCK_NS]  24.89,84.07 0 top
JP13  [JST-2-PTH]  14.35,76.45 90 top
JP14  [1X02_NO_SILK]  9.65,75.18 90 top
JP15  [SCREWTERMINAL-3.5MM-2-NS]  12.19,74.68 90 top
JP16  [1X10_LOCK_NS]  24.89,87.63 0 top
JP17  [1X10_LOCK_NS]  24.89,110.49 0 top
JP18  [JST-2-PTH]  14.35,102.87 90 top
JP19  [1X02_NO_SILK]  9.65,101.6 90 top
JP20  [SCREWTERMINAL-3.5MM-2-NS]  12.19,101.09 90 top
JP21  [1X10_LOCK_NS]  24.89,114.05 0 top
JP22  [1X10_LOCK_NS]  24.89,136.91 0 top
JP23  [JST-2-PTH]  14.35,129.29 90 top
JP24  [1X02_NO_SILK]  9.65,128.02 90 top
JP25  [SCREWTERMINAL-3.5MM-2-NS]  12.19,127.51 90 top
JP26  [1X10_LOCK_NS]  82.3,8.38 0 top
JP27  [1X10_LOCK_NS]  82.3,31.24 0 top
JP28  [JST-2-PTH]  71.75,23.62 90 top
JP29  [1X02_NO_SILK]  67.06,22.35 90 top
JP30  [SCREWTERMINAL-3.5MM-2-NS]  69.6,21.84 90 top
JP31  [1X10_LOCK_NS]  82.3,34.8 0 top
JP32  [1X10_LOCK_NS]  82.3,57.66 0 top
JP33  [JST-2-PTH]  71.75,50.04 90 top
JP34  [1X02_NO_SILK]  67.06,48.77 90 top
JP35  [SCREWTERMINAL-3.5MM-2-NS]  69.6,48.26 90 top
JP36  [1X10_LOCK_NS]  82.3,61.21 0 top
JP37  [1X10_LOCK_NS]  82.3,84.07 0 top
JP38  [JST-2-PTH]  71.75,76.45 90 top
JP39  [1X02_NO_SILK]  67.06,75.18 90 top
JP40  [SCREWTERMINAL-3.5MM-2-NS]  69.6,74.68 90 top
JP41  [1X10_LOCK_NS]  82.3,87.63 0 top
JP42  [1X10_LOCK_NS]  82.3,110.49 0 top
JP43  [JST-2-PTH]  71.75,102.87 90 top
JP44  [1X02_NO_SILK]  67.06,101.6 90 top
JP45  [SCREWTERMINAL-3.5MM-2-NS]  69.6,101.09 90 top
JP46  [1X10_LOCK_NS]  82.3,114.05 0 top
JP47  [1X10_LOCK_NS]  82.3,136.91 0 top
JP48  [JST-2-PTH]  71.75,129.29 90 top
JP49  [1X02_NO_SILK]  67.06,128.02 90 top
JP50  [SCREWTERMINAL-3.5MM-2-NS]  69.6,127.51 90 top
JP51  [1X10_LOCK_NS]  139.7,8.38 0 top
JP52  [1X10_LOCK_NS]  139.7,31.24 0 top
JP53  [JST-2-PTH]  129.16,23.62 90 top
JP54  [1X02_NO_SILK]  124.46,22.35 90 top
JP55  [SCREWTERMINAL-3.5MM-2-NS]  127,21.84 90 top
JP56  [1X10_LOCK_NS]  139.7,34.8 0 top
JP57  [1X10_LOCK_NS]  139.7,57.66 0 top
JP58  [JST-2-PTH]  129.16,50.04 90 top
JP59  [1X02_NO_SILK]  124.46,48.77 90 top
JP60  [SCREWTERMINAL-3.5MM-2-NS]  127,48.26 90 top
JP61  [1X10_LOCK_NS]  139.7,61.21 0 top
JP62  [1X10_LOCK_NS]  139.7,84.07 0 top
JP63  [JST-2-PTH]  129.16,76.45 90 top
JP64  [1X02_NO_SILK]  124.46,75.18 90 top
JP65  [SCREWTERMINAL-3.5MM-2-NS]  127,74.68 90 top
JP66  [1X10_LOCK_NS]  139.7,87.63 0 top
JP67  [1X10_LOCK_NS]  139.7,110.49 0 top
JP68  [JST-2-PTH]  129.16,102.87 90 top
JP69  [1X02_NO_SILK]  124.46,101.6 90 top
JP70  [SCREWTERMINAL-3.5MM-2-NS]  127,101.09 90 top
JP71  [1X10_LOCK_NS]  139.7,114.05 0 top
JP72  [1X10_LOCK_NS]  139.7,136.91 0 top
JP73  [JST-2-PTH]  129.16,129.29 90 top
JP74  [1X02_NO_SILK]  124.46,128.02 90 top
JP75  [SCREWTERMINAL-3.5MM-2-NS]  127,127.51 90 top
JP76  [1X10_LOCK_NS]  197.1,8.38 0 top
JP77  [1X10_LOCK_NS]  197.1,31.24 0 top
JP78  [JST-2-PTH]  186.56,23.62 90 top
JP79  [1X02_NO_SILK]  181.86,22.35 90 top
JP80  [SCREWTERMINAL-3.5MM-2-NS]  184.4,21.84 90 top
JP81  [1X10_LOCK_NS]  197.1,34.8 0 top
JP82  [1X10_LOCK_NS]  197.1,57.66 0 top
JP83  [JST-2-PTH]  186.56,50.04 90 top
JP84  [1X02_NO_SILK]  181.86,48.77 90 top
JP85  [SCREWTERMINAL-3.5MM-2-NS]  184.4,48.26 90 top
JP86  [1X10_LOCK_NS]  197.1,61.21 0 top
JP87  [1X10_LOCK_NS]  197.1,84.07 0 top
JP88  [JST-2-PTH]  186.56,76.45 90 top
JP89  [1X02_NO_SILK]  181.86,75.18 90 top
JP90  [SCREWTERMINAL-3.5MM-2-NS]  184.4,74.68 90 top
JP91  [1X10_LOCK_NS]  197.1,87.63 0 top
JP92  [1X10_LOCK_NS]  197.1,110.49 0 top
JP93  [JST-2-PTH]  186.56,102.87 90 top
JP94  [1X02_NO_SILK]  181.86,101.6 90 top
JP95  [SCREWTERMINAL-3.5MM-2-NS]  184.4,101.09 90 top
JP96  [1X10_LOCK_NS]  197.1,114.05 0 top
JP97  [1X10_LOCK_NS]  197.1,136.91 0 top
JP98  [JST-2-PTH]  186.56,129.29 90 top
JP99  [1X02_NO_SILK]  181.86,128.02 90 top
JP100  [SCREWTERMINAL-3.5MM-2-NS]  184.4,127.51 90 top
L1  DNP  [0603]  47.75,20.21 270 top
L2  DNP  [0603]  52.32,20.64 270 top
L3  DNP  [0603]  47.75,46.62 270 top
L4  DNP  [0603]  52.32,47.05 270 top
L5  DNP  [0603]  47.75,73.04 270 top
L6  DNP  [0603]  52.32,73.47 270 top
L7  DNP  [0603]  47.75,99.45 270 top
L8  DNP  [0603]  52.32,99.89 270 top
L9  DNP  [0603]  47.75,125.87 270 top
L10  DNP  [0603]  52.32,126.3 270 top
L11  DNP  [0603]  105.16,20.21 270 top
L12  DNP  [0603]  109.73,20.64 270 top
L13  DNP  [0603]  105.16,46.62 270 top
L14  DNP  [0603]  109.73,47.05 270 top
L15  DNP  [0603]  105.16,73.04 270 top
L16  DNP  [0603]  109.73,73.47 270 top
L17  DNP  [0603]  105.16,99.45 270 top
L18  DNP  [0603]  109.73,99.89 270 top
L19  DNP  [0603]  105.16,125.87 270 top
L20  DNP  [0603]  109.73,126.3 270 top
L21  DNP  [0603]  162.56,20.21 270 top
L22  DNP  [0603]  167.13,20.64 270 top
L23  DNP  [0603]  162.56,46.62 270 top
L24  DNP  [0603]  167.13,47.05 270 top
L25  DNP  [0603]  162.56,73.04 270 top
L26  DNP  [0603]  167.13,73.47 270 top
L27  DNP  [0603]  162.56,99.45 270 top
L28  DNP  [0603]  167.13,99.89 270 top
L29  DNP  [0603]  162.56,125.87 270 top
L30  DNP  [0603]  167.13,126.3 270 top
L31  DNP  [0603]  219.96,20.21 270 top
L32  DNP  [0603]  224.54,20.64 270 top
L33  DNP  [0603]  219.96,46.62 270 top
L34  DNP  [0603]  224.54,47.05 270 top
L35  DNP  [0603]  219.96,73.04 270 top
L36  DNP  [0603]  224.54,73.47 270 top
L37  DNP  [0603]  219.96,99.45 270 top
L38  DNP  [0603]  224.54,99.89 270 top
L39  DNP  [0603]  219.96,125.87 270 top
L40  DNP  [0603]  224.54,126.3 270 top
LOGO1  SFE_LOGO_NAME.2_INCH  [SFE_LOGO_NAME_.2]  61.72,8.76 90 top
LOGO2  OSHW-LOGOS  [OSHW-LOGO-S]  15.88,8.89 0 top
LOGO3  SFE_LOGO_NAME.2_INCH  [SFE_LOGO_NAME_.2]  61.72,35.18 90 top
LOGO4  OSHW-LOGOS  [OSHW-LOGO-S]  15.88,35.31 0 top
LOGO5  SFE_LOGO_NAME.2_INCH  [SFE_LOGO_NAME_.2]  61.72,61.59 90 top
LOGO6  OSHW-LOGOS  [OSHW-LOGO-S]  15.88,61.72 0 top
LOGO7  SFE_LOGO_NAME.2_INCH  [SFE_LOGO_NAME_.2]  61.72,88.01 90 top
LOGO8  OSHW-LOGOS  [OSHW-LOGO-S]  15.88,88.14 0 top
LOGO9  SFE_LOGO_NAME.2_INCH  [SFE_LOGO_NAME_.2]  61.72,114.43 90 top
LOGO10  OSHW-LOGOS  [OSHW-LOGO-S]  15.88,114.55 0 top
LOGO11  SFE_LOGO_NAME.2_INCH  [SFE_LOGO_NAME_.2]  119.13,8.76 90 top
LOGO12  OSHW-LOGOS  [OSHW-LOGO-S]  73.28,8.89 0 top
LOGO13  SFE_LOGO_NAME.2_INCH  [SFE_LOGO_NAME_.2]  119.13,35.18 90 top
LOGO14  OSHW-LOGOS  [OSHW-LOGO-S]  73.28,35.31 0 top
LOGO15  SFE_LOGO_NAME.2_INCH  [SFE_LOGO_NAME_.2]  119.13,61.59 90 top
LOGO16  OSHW-LOGOS  [OSHW-LOGO-S]  73.28,61.72 0 top
LOGO17  SFE_LOGO_NAME.2_INCH  [SFE_LOGO_NAME_.2]  119.13,88.01 90 top
LOGO18  OSHW-LOGOS  [OSHW-LOGO-S]  73.28,88.14 0 top
LOGO19  SFE_LOGO_NAME.2_INCH  [SFE_LOGO_NAME_.2]  119.13,114.43 90 top
LOGO20  OSHW-LOGOS  [OSHW-LOGO-S]  73.28,114.55 0 top
LOGO21  SFE_LOGO_NAME.2_INCH  [SFE_LOGO_NAME_.2]  176.53,8.76 90 top
LOGO22  OSHW-LOGOS  [OSHW-LOGO-S]  130.68,8.89 0 top
LOGO23  SFE_LOGO_NAME.2_INCH  [SFE_LOGO_NAME_.2]  176.53,35.18 90 top
LOGO24  OSHW-LOGOS  [OSHW-LOGO-S]  130.68,35.31 0 top
LOGO25  SFE_LOGO_NAME.2_INCH  [SFE_LOGO_NAME_.2]  176.53,61.59 90 top
LOGO26  OSHW-LOGOS  [OSHW-LOGO-S]  130.68,61.72 0 top
LOGO27  SFE_LOGO_NAME.2_INCH  [SFE_LOGO_NAME_.2]  176.53,88.01 90 top
LOGO28  OSHW-LOGOS  [OSHW-LOGO-S]  130.68,88.14 0 top
LOGO29  SFE_LOGO_NAME.2_INCH  [SFE_LOGO_NAME_.2]  176.53,114.43 90 top
LOGO30  OSHW-LOGOS  [OSHW-LOGO-S]  130.68,114.55 0 top
LOGO31  SFE_LOGO_NAME.2_INCH  [SFE_LOGO_NAME_.2]  233.93,8.76 90 top
LOGO32  OSHW-LOGOS  [OSHW-LOGO-S]  188.09,8.89 0 top
LOGO33  SFE_LOGO_NAME.2_INCH  [SFE_LOGO_NAME_.2]  233.93,35.18 90 top
LOGO34  OSHW-LOGOS  [OSHW-LOGO-S]  188.09,35.31 0 top
LOGO35  SFE_LOGO_NAME.2_INCH  [SFE_LOGO_NAME_.2]  233.93,61.59 90 top
LOGO36  OSHW-LOGOS  [OSHW-LOGO-S]  188.09,61.72 0 top
LOGO37  SFE_LOGO_NAME.2_INCH  [SFE_LOGO_NAME_.2]  233.93,88.01 90 top
LOGO38  OSHW-LOGOS  [OSHW-LOGO-S]  188.09,88.14 0 top
LOGO39  SFE_LOGO_NAME.2_INCH  [SFE_LOGO_NAME_.2]  233.93,114.43 90 top
LOGO40  OSHW-LOGOS  [OSHW-LOGO-S]  188.09,114.55 0 top
Q1  600mA/40V  [SOT23-3]  33.78,14.1 180 top
Q2  600mA/40V  [SOT23-3]  33.78,17.91 0 top
Q3  600mA/40V  [SOT23-3]  33.78,40.51 180 top
Q4  600mA/40V  [SOT23-3]  33.78,44.32 0 top
Q5  600mA/40V  [SOT23-3]  33.78,66.93 180 top
Q6  600mA/40V  [SOT23-3]  33.78,70.74 0 top
Q7  600mA/40V  [SOT23-3]  33.78,93.34 180 top
Q8  600mA/40V  [SOT23-3]  33.78,97.16 0 top
Q9  600mA/40V  [SOT23-3]  33.78,119.76 180 top
Q10  600mA/40V  [SOT23-3]  33.78,123.57 0 top
Q11  600mA/40V  [SOT23-3]  91.19,14.1 180 top
Q12  600mA/40V  [SOT23-3]  91.19,17.91 0 top
Q13  600mA/40V  [SOT23-3]  91.19,40.51 180 top
Q14  600mA/40V  [SOT23-3]  91.19,44.32 0 top
Q15  600mA/40V  [SOT23-3]  91.19,66.93 180 top
Q16  600mA/40V  [SOT23-3]  91.19,70.74 0 top
Q17  600mA/40V  [SOT23-3]  91.19,93.34 180 top
Q18  600mA/40V  [SOT23-3]  91.19,97.16 0 top
Q19  600mA/40V  [SOT23-3]  91.19,119.76 180 top
Q20  600mA/40V  [SOT23-3]  91.19,123.57 0 top
Q21  600mA/40V  [SOT23-3]  148.59,14.1 180 top
Q22  600mA/40V  [SOT23-3]  148.59,17.91 0 top
Q23  600mA/40V  [SOT23-3]  148.59,40.51 180 top
Q24  600mA/40V  [SOT23-3]  148.59,44.32 0 top
Q25  600mA/40V  [SOT23-3]  148.59,66.93 180 top
Q26  600mA/40V  [SOT23-3]  148.59,70.74 0 top
Q27  600mA/40V  [SOT23-3]  148.59,93.34 180 top
Q28  600mA/40V  [SOT23-3]  148.59,97.16 0 top
Q29  600mA/40V  [SOT23-3]  148.59,119.76 180 top
Q30  600mA/40V  [SOT23-3]  148.59,123.57 0 top
Q31  600mA/40V  [SOT23-3]  205.99,14.1 180 top
Q32  600mA/40V  [SOT23-3]  205.99,17.91 0 top
Q33  600mA/40V  [SOT23-3]  205.99,40.51 180 top
Q34  600mA/40V  [SOT23-3]  205.99,44.32 0 top
Q35  600mA/40V  [SOT23-3]  205.99,66.93 180 top
Q36  600mA/40V  [SOT23-3]  205.99,70.74 0 top
Q37  600mA/40V  [SOT23-3]  205.99,93.34 180 top
Q38  600mA/40V  [SOT23-3]  205.99,97.16 0 top
Q39  600mA/40V  [SOT23-3]  205.99,119.76 180 top
Q40  600mA/40V  [SOT23-3]  205.99,123.57 0 top
R1  12k  [0603]  45.21,16 90 top
R2  10k  [0603]  49.02,24.26 270 top
R3  200  [0603]  27.43,26.16 0 top
R4  200  [0603]  34.42,27.43 90 top
R5  10k  [0603]  46.48,16 270 top
R6  200  [0603]  27.43,27.43 180 top
R7  27  [0603]  16.51,14.43 0 top
R8  27  [0603]  16.51,13.16 0 top
R9  10k  [0603]  36.32,16 270 top
R10  10k  [0603]  31.24,16 90 top
R11  10k  [0603]  31.24,12.19 90 top
R12  1k  [0603]  38.86,12.19 90 top
R13  1k  [0603]  36.32,12.19 270 top
R14  10k  [0603]  33.15,27.43 90 top
R15  1k  [0603]  27.43,24.89 180 top
R16  1k  [0603]  27.43,23.62 180 top
R17  10k  [0603]  47.75,27.43 90 top
R18  12k  [0603]  45.21,42.42 90 top
R19  1k  [0603]  36.32,38.61 270 top
R20  27  [0603]  16.51,40.84 0 top
R21  27  [0603]  16.51,39.57 0 top
R22  200  [0603]  27.43,52.58 0 top
R23  1k  [0603]  27.43,50.04 180 top
R24  10k  [0603]  49.02,50.67 270 top
R25  200  [0603]  34.42,53.85 90 top
R26  10k  [0603]  46.48,42.42 270 top
R27  200  [0603]  27.43,53.85 180 top
R28  1k  [0603]  27.43,51.31 180 top
R29  10k  [0603]  47.75,53.85 90 top
R30  1k  [0603]  38.86,38.61 90 top
R31  10k  [0603]  33.15,53.85 90 top
R32  10k  [0603]  31.24,38.61 90 top
R33  10k  [0603]  36.32,42.42 270 top
R34  10k  [0603]  31.24,42.42 90 top
R35  12k  [0603]  45.21,68.83 90 top
R36  1k  [0603]  36.32,65.02 270 top
R37  27  [0603]  16.51,67.26 0 top
R38  27  [0603]  16.51,65.99 0 top
R39  200  [0603]  27.43,78.99 0 top
R40  1k  [0603]  27.43,76.45 180 top
R41  10k  [0603]  49.02,77.09 270 top
R42  200  [0603]  34.42,80.26 90 top
R43  10k  [0603]  46.48,68.83 270 top
R44  200  [0603]  27.43,80.26 180 top
R45  1k  [0603]  27.43,77.72 180 top
R46  10k  [0603]  47.75,80.26 90 top
R47  1k  [0603]  38.86,65.02 90 top
R48  10k  [0603]  33.15,80.26 90 top
R49  10k  [0603]  31.24,65.02 90 top
R50  10k  [0603]  36.32,68.83 270 top
R51  10k  [0603]  31.24,68.83 90 top
R52  12k  [0603]  45.21,95.25 90 top
R53  1k  [0603]  36.32,91.44 270 top
R54  27  [0603]  16.51,93.68 0 top
R55  27  [0603]  16.51,92.41 0 top
R56  200  [0603]  27.43,105.41 0 top
R57  1k  [0603]  27.43,102.87 180 top
R58  10k  [0603]  49.02,103.5 270 top
R59  200  [0603]  34.42,106.68 90 top
R60  10k  [0603]  46.48,95.25 270 top
R61  200  [0603]  27.43,106.68 180 top
R62  1k  [0603]  27.43,104.14 180 top
R63  10k  [0603]  47.75,106.68 90 top
R64  1k  [0603]  38.86,91.44 90 top
R65  10k  [0603]  33.15,106.68 90 top
R66  10k  [0603]  31.24,91.44 90 top
R67  10k  [0603]  36.32,95.25 270 top
R68  10k  [0603]  31.24,95.25 90 top
R69  12k  [0603]  45.21,121.67 90 top
R70  1k  [0603]  36.32,117.86 270 top
R71  27  [0603]  16.51,120.09 0 top
R72  27  [0603]  16.51,118.82 0 top
R73  200  [0603]  27.43,131.83 0 top
R74  1k  [0603]  27.43,129.29 180 top
R75  10k  [0603]  49.02,129.92 270 top
R76  200  [0603]  34.42,133.1 90 top
R77  10k  [0603]  46.48,121.67 270 top
R78  200  [0603]  27.43,133.1 180 top
R79  1k  [0603]  27.43,130.56 180 top
R80  10k  [0603]  47.75,133.1 90 top
R81  1k  [0603]  38.86,117.86 90 top
R82  10k  [0603]  33.15,133.1 90 top
R83  10k  [0603]  31.24,117.86 90 top
R84  10k  [0603]  36.32,121.67 270 top
R85  10k  [0603]  31.24,121.67 90 top
R86  12k  [0603]  102.62,16 90 top
R87  1k  [0603]  93.73,12.19 270 top
R88  27  [0603]  73.91,14.43 0 top
R89  27  [0603]  73.91,13.16 0 top
R90  200  [0603]  84.84,26.16 0 top
R91  1k  [0603]  84.84,23.62 180 top
R92  10k  [0603]  106.43,24.26 270 top
R93  200  [0603]  91.82,27.43 90 top
R94  10k  [0603]  103.89,16 270 top
R95  200  [0603]  84.84,27.43 180 top
R96  1k  [0603]  84.84,24.89 180 top
R97  10k  [0603]  105.16,27.43 90 top
R98  1k  [0603]  96.27,12.19 90 top
R99  10k  [0603]  90.55,27.43 90 top
R100  10k  [0603]  88.65,12.19 90 top
R101  10k  [0603]  93.73,16 270 top
R102  10k  [0603]  88.65,16 90 top
R103  12k  [0603]  102.62,42.42 90 top
R104  1k  [0603]  93.73,38.61 270 top
R105  27  [0603]  73.91,40.84 0 top
R106  27  [0603]  73.91,39.57 0 top
R107  200  [0603]  84.84,52.58 0 top
R108  1k  [0603]  84.84,50.04 180 top
R109  10k  [0603]  106.43,50.67 270 top
R110  200  [0603]  91.82,53.85 90 top
R111  10k  [0603]  103.89,42.42 270 top
R112  200  [0603]  84.84,53.85 180 top
R113  1k  [0603]  84.84,51.31 180 top
R114  10k  [0603]  105.16,53.85 90 top
R115  1k  [0603]  96.27,38.61 90 top
R116  10k  [0603]  90.55,53.85 90 top
R117  10k  [0603]  88.65,38.61 90 top
R118  10k  [0603]  93.73,42.42 270 top
R119  10k  [0603]  88.65,42.42 90 top
R120  12k  [0603]  102.62,68.83 90 top
R121  1k  [0603]  93.73,65.02 270 top
R122  27  [0603]  73.91,67.26 0 top
R123  27  [0603]  73.91,65.99 0 top
R124  200  [0603]  84.84,78.99 0 top
R125  1k  [0603]  84.84,76.45 180 top
R126  10k  [0603]  106.43,77.09 270 top
R127  200  [0603]  91.82,80.26 90 top
R128  10k  [0603]  103.89,68.83 270 top
R129  200  [0603]  84.84,80.26 180 top
R130  1k  [0603]  84.84,77.72 180 top
R131  10k  [0603]  105.16,80.26 90 top
R132  1k  [0603]  96.27,65.02 90 top
R133  10k  [0603]  90.55,80.26 90 top
R134  10k  [0603]  88.65,65.02 90 top
R135  10k  [0603]  93.73,68.83 270 top
R136  10k  [0603]  88.65,68.83 90 top
R137  12k  [0603]  102.62,95.25 90 top
R138  1k  [0603]  93.73,91.44 270 top
R139  27  [0603]  73.91,93.68 0 top
R140  27  [0603]  73.91,92.41 0 top
R141  200  [0603]  84.84,105.41 0 top
R142  1k  [0603]  84.84,102.87 180 top
R143  10k  [0603]  106.43,103.5 270 top
R144  200  [0603]  91.82,106.68 90 top
R145  10k  [0603]  103.89,95.25 270 top
R146  200  [0603]  84.84,106.68 180 top
R147  1k  [0603]  84.84,104.14 180 top
R148  10k  [0603]  105.16,106.68 90 top
R149  1k  [0603]  96.27,91.44 90 top
R150  10k  [0603]  90.55,106.68 90 top
R151  10k  [0603]  88.65,91.44 90 top
R152  10k  [0603]  93.73,95.25 270 top
R153  10k  [0603]  88.65,95.25 90 top
R154  12k  [0603]  102.62,121.67 90 top
R155  1k  [0603]  93.73,117.86 270 top
R156  27  [0603]  73.91,120.09 0 top
R157  27  [0603]  73.91,118.82 0 top
R158  200  [0603]  84.84,131.83 0 top
R159  1k  [0603]  84.84,129.29 180 top
R160  10k  [0603]  106.43,129.92 270 top
R161  200  [0603]  91.82,133.1 90 top
R162  10k  [0603]  103.89,121.67 270 top
R163  200  [0603]  84.84,133.1 180 top
R164  1k  [0603]  84.84,130.56 180 top
R165  10k  [0603]  105.16,133.1 90 top
R166  1k  [0603]  96.27,117.86 90 top
R167  10k  [0603]  90.55,133.1 90 top
R168  10k  [0603]  88.65,117.86 90 top
R169  10k  [0603]  93.73,121.67 270 top
R170  10k  [0603]  88.65,121.67 90 top
R171  12k  [0603]  160.02,16 90 top
R172  1k  [0603]  151.13,12.19 270 top
R173  27  [0603]  131.32,14.43 0 top
R174  27  [0603]  131.32,13.16 0 top
R175  200  [0603]  142.24,26.16 0 top
R176  1k  [0603]  142.24,23.62 180 top
R177  10k  [0603]  163.83,24.26 270 top
R178  200  [0603]  149.22,27.43 90 top
R179  10k  [0603]  161.29,16 270 top
R180  200  [0603]  142.24,27.43 180 top
R181  1k  [0603]  142.24,24.89 180 top
R182  10k  [0603]  162.56,27.43 90 top
R183  1k  [0603]  153.67,12.19 90 top
R184  10k  [0603]  147.96,27.43 90 top
R185  10k  [0603]  146.05,12.19 90 top
R186  10k  [0603]  151.13,16 270 top
R187  10k  [0603]  146.05,16 90 top
R188  12k  [0603]  160.02,42.42 90 top
R189  1k  [0603]  151.13,38.61 270 top
R190  27  [0603]  131.32,40.84 0 top
R191  27  [0603]  131.32,39.57 0 top
R192  200  [0603]  142.24,52.58 0 top
R193  1k  [0603]  142.24,50.04 180 top
R194  10k  [0603]  163.83,50.67 270 top
R195  200  [0603]  149.22,53.85 90 top
R196  10k  [0603]  161.29,42.42 270 top
R197  200  [0603]  142.24,53.85 180 top
R198  1k  [0603]  142.24,51.31 180 top
R199  10k  [0603]  162.56,53.85 90 top
R200  1k  [0603]  153.67,38.61 90 top
R201  10k  [0603]  147.96,53.85 90 top
R202  10k  [0603]  146.05,38.61 90 top
R203  10k  [0603]  151.13,42.42 270 top
R204  10k  [0603]  146.05,42.42 90 top
R205  12k  [0603]  160.02,68.83 90 top
R206  1k  [0603]  151.13,65.02 270 top
R207  27  [0603]  131.32,67.26 0 top
R208  27  [0603]  131.32,65.99 0 top
R209  200  [0603]  142.24,78.99 0 top
R210  1k  [0603]  142.24,76.45 180 top
R211  10k  [0603]  163.83,77.09 270 top
R212  200  [0603]  149.22,80.26 90 top
R213  10k  [0603]  161.29,68.83 270 top
R214  200  [0603]  142.24,80.26 180 top
R215  1k  [0603]  142.24,77.72 180 top
R216  10k  [0603]  162.56,80.26 90 top
R217  1k  [0603]  153.67,65.02 90 top
R218  10k  [0603]  147.96,80.26 90 top
R219  10k  [0603]  146.05,65.02 90 top
R220  10k  [0603]  151.13,68.83 270 top
R221  10k  [0603]  146.05,68.83 90 top
R222  12k  [0603]  160.02,95.25 90 top
R223  1k  [0603]  151.13,91.44 270 top
R224  27  [0603]  131.32,93.68 0 top
R225  27  [0603]  131.32,92.41 0 top
R226  200  [0603]  142.24,105.41 0 top
R227  1k  [0603]  142.24,102.87 180 top
R228  10k  [0603]  163.83,103.5 270 top
R229  200  [0603]  149.22,106.68 90 top
R230  10k  [0603]  161.29,95.25 270 top
R231  200  [0603]  142.24,106.68 180 top
R232  1k  [0603]  142.24,104.14 180 top
R233  10k  [0603]  162.56,106.68 90 top
R234  1k  [0603]  153.67,91.44 90 top
R235  10k  [0603]  147.96,106.68 90 top
R236  10k  [0603]  146.05,91.44 90 top
R237  10k  [0603]  151.13,95.25 270 top
R238  10k  [0603]  146.05,95.25 90 top
R239  12k  [0603]  160.02,121.67 90 top
R240  1k  [0603]  151.13,117.86 270 top
R241  27  [0603]  131.32,120.09 0 top
R242  27  [0603]  131.32,118.82 0 top
R243  200  [0603]  142.24,131.83 0 top
R244  1k  [0603]  142.24,129.29 180 top
R245  10k  [0603]  163.83,129.92 270 top
R246  200  [0603]  149.22,133.1 90 top
R247  10k  [0603]  161.29,121.67 270 top
R248  200  [0603]  142.24,133.1 180 top
R249  1k  [0603]  142.24,130.56 180 top
R250  10k  [0603]  162.56,133.1 90 top
R251  1k  [0603]  153.67,117.86 90 top
R252  10k  [0603]  147.96,133.1 90 top
R253  10k  [0603]  146.05,117.86 90 top
R254  10k  [0603]  151.13,121.67 270 top
R255  10k  [0603]  146.05,121.67 90 top
R256  12k  [0603]  217.42,16 90 top
R257  1k  [0603]  208.53,12.19 270 top
R258  27  [0603]  188.72,14.43 0 top
R259  27  [0603]  188.72,13.16 0 top
R260  200  [0603]  199.64,26.16 0 top
R261  1k  [0603]  199.64,23.62 180 top
R262  10k  [0603]  221.23,24.26 270 top
R263  200  [0603]  206.63,27.43 90 top
R264  10k  [0603]  218.69,16 270 top
R265  200  [0603]  199.64,27.43 180 top
R266  1k  [0603]  199.64,24.89 180 top
R267  10k  [0603]  219.96,27.43 90 top
R268  1k  [0603]  211.07,12.19 90 top
R269  10k  [0603]  205.36,27.43 90 top
R270  10k  [0603]  203.45,12.19 90 top
R271  10k  [0603]  208.53,16 270 top
R272  10k  [0603]  203.45,16 90 top
R273  12k  [0603]  217.42,42.42 90 top
R274  1k  [0603]  208.53,38.61 270 top
R275  27  [0603]  188.72,40.84 0 top
R276  27  [0603]  188.72,39.57 0 top
R277  200  [0603]  199.64,52.58 0 top
R278  1k  [0603]  199.64,50.04 180 top
R279  10k  [0603]  221.23,50.67 270 top
R280  200  [0603]  206.63,53.85 90 top
R281  10k  [0603]  218.69,42.42 270 top
R282  200  [0603]  199.64,53.85 180 top
R283  1k  [0603]  199.64,51.31 180 top
R284  10k  [0603]  219.96,53.85 90 top
R285  1k  [0603]  211.07,38.61 90 top
R286  10k  [0603]  205.36,53.85 90 top
R287  10k  [0603]  203.45,38.61 90 top
R288  10k  [0603]  208.53,42.42 270 top
R289  10k  [0603]  203.45,42.42 90 top
R290  12k  [0603]  217.42,68.83 90 top
R291  1k  [0603]  208.53,65.02 270 top
R292  27  [0603]  188.72,67.26 0 top
R293  27  [0603]  188.72,65.99 0 top
R294  200  [0603]  199.64,78.99 0 top
R295  1k  [0603]  199.64,76.45 180 top
R296  10k  [0603]  221.23,77.09 270 top
R297  200  [0603]  206.63,80.26 90 top
R298  10k  [0603]  218.69,68.83 270 top
R299  200  [0603]  199.64,80.26 180 top
R300  1k  [0603]  199.64,77.72 180 top
R301  10k  [0603]  219.96,80.26 90 top
R302  1k  [0603]  211.07,65.02 90 top
R303  10k  [0603]  205.36,80.26 90 top
R304  10k  [0603]  203.45,65.02 90 top
R305  10k  [0603]  208.53,68.83 270 top
R306  10k  [0603]  203.45,68.83 90 top
R307  12k  [0603]  217.42,95.25 90 top
R308  1k  [0603]  208.53,91.44 270 top
R309  27  [0603]  188.72,93.68 0 top
R310  27  [0603]  188.72,92.41 0 top
R311  200  [0603]  199.64,105.41 0 top
R312  1k  [0603]  199.64,102.87 180 top
R313  10k  [0603]  221.23,103.5 270 top
R314  200  [0603]  206.63,106.68 90 top
R315  10k  [0603]  218.69,95.25 270 top
R316  200  [0603]  199.64,106.68 180 top
R317  1k  [0603]  199.64,104.14 180 top
R318  10k  [0603]  219.96,106.68 90 top
R319  1k  [0603]  211.07,91.44 90 top
R320  10k  [0603]  205.36,106.68 90 top
R321  10k  [0603]  203.45,91.44 90 top
R322  10k  [0603]  208.53,95.25 270 top
R323  10k  [0603]  203.45,95.25 90 top
R324  12k  [0603]  217.42,121.67 90 top
R325  1k  [0603]  208.53,117.86 270 top
R326  27  [0603]  188.72,120.09 0 top
R327  27  [0603]  188.72,118.82 0 top
R328  200  [0603]  199.64,131.83 0 top
R329  1k  [0603]  199.64,129.29 180 top
R330  10k  [0603]  221.23,129.92 270 top
R331  200  [0603]  206.63,133.1 90 top
R332  10k  [0603]  218.69,121.67 270 top
R333  200  [0603]  199.64,133.1 180 top
R334  1k  [0603]  199.64,130.56 180 top
R335  10k  [0603]  219.96,133.1 90 top
R336  1k  [0603]  211.07,117.86 90 top
R337  10k  [0603]  205.36,133.1 90 top
R338  10k  [0603]  203.45,117.86 90 top
R339  10k  [0603]  208.53,121.67 270 top
R340  10k  [0603]  203.45,121.67 90 top
S1  [SWITCH_SPST_SMD_A]  12.95,29.72 0 top
S2  [SWITCH_SPST_SMD_A]  12.95,56.13 0 top
S3  [SWITCH_SPST_SMD_A]  12.95,82.55 0 top
S4  [SWITCH_SPST_SMD_A]  12.95,108.97 0 top
S5  [SWITCH_SPST_SMD_A]  12.95,135.38 0 top
S6  [SWITCH_SPST_SMD_A]  70.36,29.72 0 top
S7  [SWITCH_SPST_SMD_A]  70.36,56.13 0 top
S8  [SWITCH_SPST_SMD_A]  70.36,82.55 0 top
S9  [SWITCH_SPST_SMD_A]  70.36,108.97 0 top
S10  [SWITCH_SPST_SMD_A]  70.36,135.38 0 top
S11  [SWITCH_SPST_SMD_A]  127.76,29.72 0 top
S12  [SWITCH_SPST_SMD_A]  127.76,56.13 0 top
S13  [SWITCH_SPST_SMD_A]  127.76,82.55 0 top
S14  [SWITCH_SPST_SMD_A]  127.76,108.97 0 top
S15  [SWITCH_SPST_SMD_A]  127.76,135.38 0 top
S16  [SWITCH_SPST_SMD_A]  185.17,29.72 0 top
S17  [SWITCH_SPST_SMD_A]  185.17,56.13 0 top
S18  [SWITCH_SPST_SMD_A]  185.17,82.55 0 top
S19  [SWITCH_SPST_SMD_A]  185.17,108.97 0 top
S20  [SWITCH_SPST_SMD_A]  185.17,135.38 0 top
SJ1  PWRLED  [PAD-JUMPER-2-NC_BY_TRACE_YES_SILK]  28.07,26.16 180 bottom
SJ2  SLEEP-PTH  [PTH-JUMPER-2-NO_NO_SILK]  46.48,12.19 0 top
SJ3  TRACE  [PAD-JUMPER-2-NC_BY_PASTE_NO_SILK]  55.12,21.74 0 top
SJ4  U.FL  [PAD-JUMPER-2-NO_NO_SILK]  54.4,20.98 90 top
SJ5  SLEEP-PTH  [PTH-JUMPER-2-NO_NO_SILK]  46.48,38.61 0 top
SJ6  PWRLED  [PAD-JUMPER-2-NC_BY_TRACE_YES_SILK]  28.07,52.58 180 bottom
SJ7  TRACE  [PAD-JUMPER-2-NC_BY_PASTE_NO_SILK]  55.12,48.16 0 top